# Altium PCB controllerV2.PcbDoc
Units mm, origin at the board's own origin, x right, y up, seen from the top; angles counter-clockwise.
Board outline 94.87 x 83.95 mm, 2 copper layers (Top Layer, Bottom Layer); 87 components, 27 nets, 393 pads, 45 vias.
Unrouted connection lines stored in the file: 2.
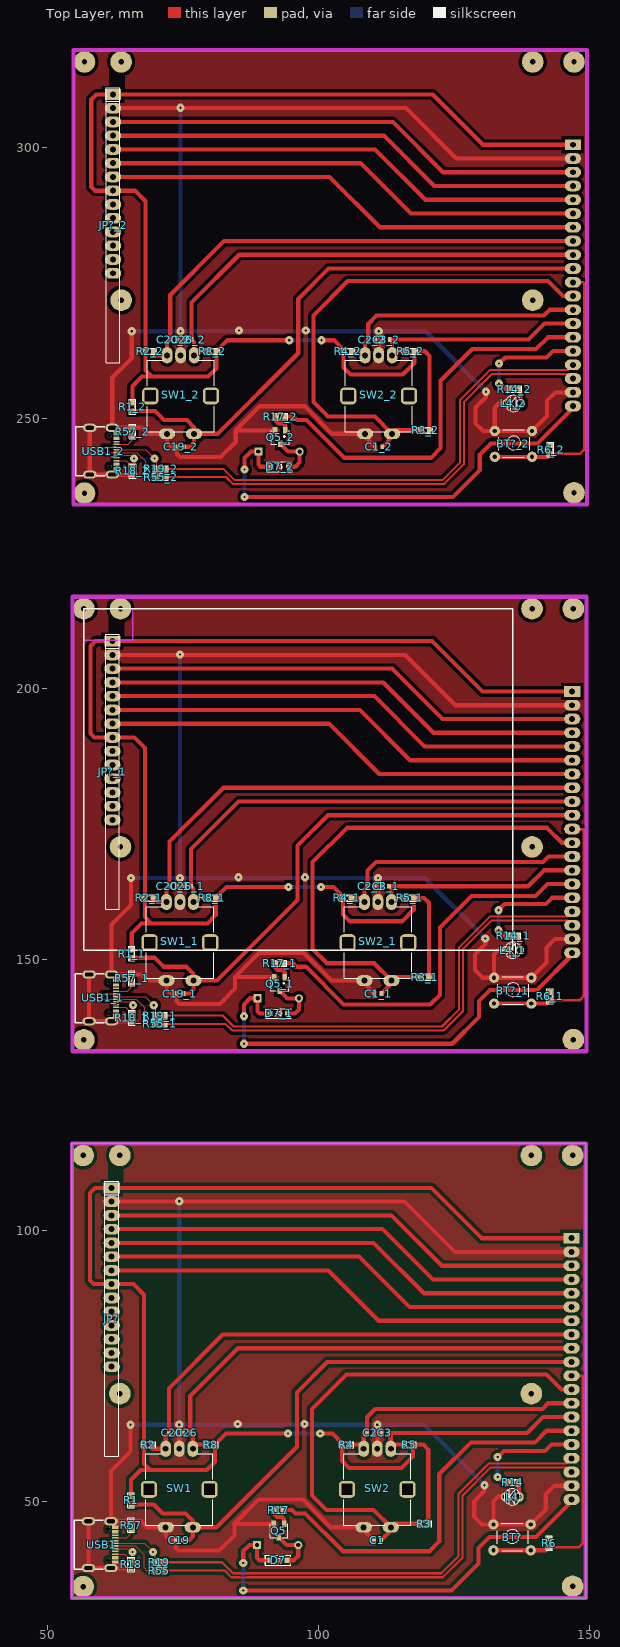
[diagram p0: Top Layer view]
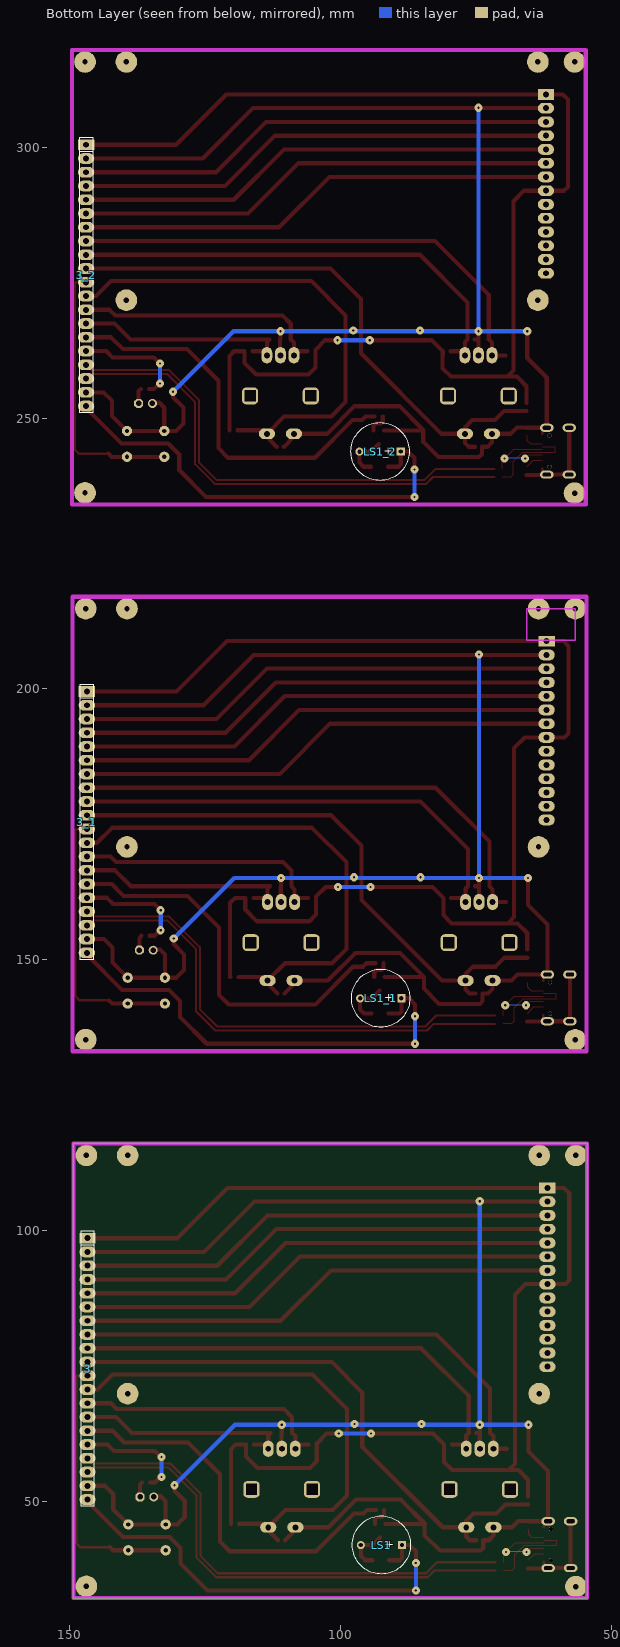
[diagram p1: Bottom Layer view, seen from below]

## Layer stack, top to bottom
Top Solder: solder mask 0.0102, Solder Resist, Dk 3.5
Top Layer: signal copper 0.0356
Dielectric 1: dielectric 0.32, FR-4, Dk 4.8
Bottom Layer: signal copper 0.0356
Bottom Solder: solder mask 0.0102, Solder Resist, Dk 3.5

## Board outline
54.483,32.131 54.483,116.078 149.352,116.078 149.352,32.131

## Design rules (kind name [scope] priority, off if disabled: settings)
Clearance [All] p1: gap=0.635 ignorepadtopadclearanceinfootprint=FALSE
DiffPairsRouting [All] p1: maxlimit=0.381 minlimit=0.356 mostfreqgap=0.356 toplayer_minwidth=0.381 toplayer_maxwidth=0.381 toplayer_prefwidth=0.381 bottomlayer_minwidth=0.381 bottomlayer_maxwidth=0.381 bottomlayer_prefwidth=0.381 maxuncoupledlength=12.7
PolygonConnect [All] p1: connectstyle=Direct reliefconductorwidth=0.254 reliefentries=4 polygonreliefangle="90 Angle" airgapwidth=0.254
RoutingVias [All] p1: holewidth=0.711 width=1.27 viastyle="Through Hole" minholewidth=0.711 minwidth=1.27 maxholewidth=0.711 maxwidth=1.27
SolderMaskExpansion [All] p1: expansion=0.102 istentingtop=FALSE
Width [All] p1: maxlimit=0.762 minlimit=0.203 preferedwidth=0.457
29 further rules are at their usual default settings.

## Classes and differential pairs
component class controller: 3 BT? C1 C2 C3 C19 C20 C26 D7 JP? L4 LS1 Q5 R1 R2 R3 R4 R5 R6 R8 R14 R17 R18 R19 R55 R57 SW1 SW2 USB1
differential pair USB: +USB_P -USB_N

## Components (designator, comment, footprint, x,y, rotation, side; value= is the part's Value field where it differs from the comment)
3 "JP 1x20 2.54" "JP 1x20 DT"#1 146.736,98.577 r270 bottom locked (schematic designator JP3)
3_1 "JP 1x20 2.54" "JP 1x20 DT"#1 146.863,199.542 r270 bottom locked (schematic designator JP3)
3_2 "JP 1x20 2.54" "JP 1x20 DT"#1 146.99,300.507 r270 bottom locked (schematic designator JP3)
BT? "Nut Nhan 4 Chan Cam 6x6" "Nut Nhan 4 Chan Cam 6x6" 132.639,45.923 r0 top
BT?_1 "Nut Nhan 4 Chan Cam 6x6" "Nut Nhan 4 Chan Cam 6x6" 132.766,146.888 r0 top (schematic designator BT?)
BT?_2 "Nut Nhan 4 Chan Cam 6x6" "Nut Nhan 4 Chan Cam 6x6" 132.893,247.853 r0 top (schematic designator BT?)
C1 "0.1uF" CAPC1608X09L 110.886,42.799 r0 top
C1_1 "0.1uF" CAPC1608X09L 111.013,143.764 r0 top (schematic designator C1)
C1_2 "0.1uF" CAPC1608X09L 111.14,244.729 r0 top (schematic designator C1)
C2 "0.1uF" CAPC1608X09L 109.601,62.611 r180 top
C2_1 "0.1uF" CAPC1608X09L 109.728,163.576 r180 top (schematic designator C2)
C2_2 "0.1uF" CAPC1608X09L 109.855,264.541 r180 top (schematic designator C2)
C3 "0.1uF" CAPC1608X09L 112.268,62.611 r0 top
C3_1 "0.1uF" CAPC1608X09L 112.395,163.576 r0 top (schematic designator C3)
C3_2 "0.1uF" CAPC1608X09L 112.522,264.541 r0 top (schematic designator C3)
C19 "0.1uF" CAPC1608X09L 74.295,42.799 r0 top
C19_1 "0.1uF" CAPC1608X09L 74.422,143.764 r0 top (schematic designator C19)
C19_2 "0.1uF" CAPC1608X09L 74.549,244.729 r0 top (schematic designator C19)
C20 "0.1uF" CAPC1608X09L 73.025,62.611 r180 top
C20_1 "0.1uF" CAPC1608X09L 73.152,163.576 r180 top (schematic designator C20)
C20_2 "0.1uF" CAPC1608X09L 73.279,264.541 r180 top (schematic designator C20)
C26 "0.1uF" CAPC1608X09L 75.677,62.611 r0 top
C26_1 "0.1uF" CAPC1608X09L 75.804,163.576 r0 top (schematic designator C26)
C26_2 "0.1uF" CAPC1608X09L 75.931,264.541 r0 top (schematic designator C26)
D7 "S4" "DIODE SOD-123" 92.583,39.116 r180 top
D7_1 "S4" "DIODE SOD-123" 92.71,140.081 r180 top (schematic designator D7)
D7_2 "S4" "DIODE SOD-123" 92.837,241.046 r180 top (schematic designator D7)
JP? "LCD 2.8 INCH" "JP 1x20 DT"#2 61.819,107.868 r270 top
JP?_1 "LCD 2.8 INCH" "JP 1x20 DT"#2 61.946,208.833 r270 top (schematic designator JP?)
JP?_2 "LCD 2.8 INCH" "JP 1x20 DT"#2 62.073,309.798 r270 top (schematic designator JP?)
L4 "LED 3mm" LED-3MM-BLUE 135.636,50.8 r180 top
L4_1 "LED 3mm" LED-3MM-BLUE 135.763,151.765 r180 top (schematic designator L4)
L4_2 "LED 3mm" LED-3MM-BLUE 135.89,252.73 r180 top (schematic designator L4)
LS1 "Coi Chip Speaker" "Coi Chip Speacker" 88.646,41.923 r0 bottom
LS1_1 "Coi Chip Speaker" "Coi Chip Speacker" 88.773,142.888 r0 bottom (schematic designator LS1)
LS1_2 "Coi Chip Speaker" "Coi Chip Speacker" 88.9,243.853 r0 bottom (schematic designator LS1)
Q5 "HF" SOT-23 92.71,44.577 r180 top value=C9014
Q5_1 "HF" SOT-23 92.837,145.542 r180 top value=C9014 (schematic designator Q5)
Q5_2 "HF" SOT-23 92.964,246.507 r180 top value=C9014 (schematic designator Q5)
R1 "10k" "Tro smd 0603" 65.405,50.165 r90 top
R1_1 "10k" "Tro smd 0603" 65.532,151.13 r90 top (schematic designator R1)
R1_2 "10k" "Tro smd 0603" 65.659,252.095 r90 top (schematic designator R1)
R2 "10k" "Tro smd 0603" 68.568,60.452 r180 top
R2_1 "10k" "Tro smd 0603" 68.695,161.417 r180 top (schematic designator R2)
R2_2 "10k" "Tro smd 0603" 68.822,262.382 r180 top (schematic designator R2)
R3 "10k" "Tro smd 0603" 119.507,45.847 r0 top
R3_1 "10k" "Tro smd 0603" 119.634,146.812 r0 top (schematic designator R3)
R3_2 "10k" "Tro smd 0603" 119.761,247.777 r0 top (schematic designator R3)
R4 "10k" "Tro smd 0603" 105.144,60.452 r180 top
R4_1 "10k" "Tro smd 0603" 105.271,161.417 r180 top (schematic designator R4)
R4_2 "10k" "Tro smd 0603" 105.398,262.382 r180 top (schematic designator R4)
R5 "10k" "Tro smd 0603" 116.725,60.452 r0 top
R5_1 "10k" "Tro smd 0603" 116.852,161.417 r0 top (schematic designator R5)
R5_2 "10k" "Tro smd 0603" 116.979,262.382 r0 top (schematic designator R5)
R6 "470RT" "Tro smd 0603" 142.621,42.291 r90 top
R6_1 "470RT" "Tro smd 0603" 142.748,143.256 r90 top (schematic designator R6)
R6_2 "470RT" "Tro smd 0603" 142.875,244.221 r90 top (schematic designator R6)
R8 "10k" "Tro smd 0603" 80.137,60.452 r0 top
R8_1 "10k" "Tro smd 0603" 80.264,161.417 r0 top (schematic designator R8)
R8_2 "10k" "Tro smd 0603" 80.391,262.382 r0 top (schematic designator R8)
R14 "470RT" "Tro smd 0603" 135.89,53.467 r0 top
R14_1 "470RT" "Tro smd 0603" 136.017,154.432 r0 top (schematic designator R14)
R14_2 "470RT" "Tro smd 0603" 136.144,255.397 r0 top (schematic designator R14)
R17 "4.7K" "Tro smd 0603" 92.71,48.387 r180 top
R17_1 "4.7K" "Tro smd 0603" 92.837,149.352 r180 top (schematic designator R17)
R17_2 "4.7K" "Tro smd 0603" 92.964,250.317 r180 top (schematic designator R17)
R18 "5k1" "tro smd 0603" 65.405,38.354 r270 top
R18_1 "5k1" "tro smd 0603" 65.532,139.319 r270 top (schematic designator R18)
R18_2 "5k1" "tro smd 0603" 65.659,240.284 r270 top (schematic designator R18)
R19 "10R" "Tro smd 0603" 70.612,38.735 r0 top
R19_1 "10R" "Tro smd 0603" 70.739,139.7 r0 top (schematic designator R19)
R19_2 "10R" "Tro smd 0603" 70.866,240.665 r0 top (schematic designator R19)
R55 "10R" "Tro smd 0603" 70.612,37.211 r0 top
R55_1 "10R" "Tro smd 0603" 70.739,138.176 r0 top (schematic designator R55)
R55_2 "10R" "Tro smd 0603" 70.866,239.141 r0 top (schematic designator R55)
R57 "5k1" "tro smd 0603" 65.405,45.593 r90 top
R57_1 "5k1" "tro smd 0603" 65.532,146.558 r90 top (schematic designator R57)
R57_2 "5k1" "tro smd 0603" 65.659,247.523 r90 top (schematic designator R57)
SW1 "voltage" 482024764004 74.295,52.197 r90 top
SW1_1 "voltage" 482024764004 74.422,153.162 r90 top (schematic designator SW1)
SW1_2 "voltage" 482024764004 74.549,254.127 r90 top (schematic designator SW1)
SW2 "Current" 482024764004 110.859,52.197 r90 top
SW2_1 "Current" 482024764004 110.986,153.162 r90 top (schematic designator SW2)
SW2_2 "Current" 482024764004 111.113,254.127 r90 top (schematic designator SW2)
USB1 "Type C 16P" "Type C 16P" 58.674,42.418 r270 top
USB1_1 "Type C 16P" "Type C 16P" 58.801,143.383 r270 top (schematic designator USB1)
USB1_2 "Type C 16P" "Type C 16P" 58.928,244.348 r270 top (schematic designator USB1)

## Footprints (in the part's own frame and the unit in brackets; to place one, negate y for a bottom-side part, rotate by r counter-clockwise, add the part's x,y. Pads: shape width x height; smd on the part's side, far side on the other; paste and mask are expansions set on the pad)
482024764004 [mm]
  oval 2x3 hole 1.1: 1(-7,-2.5) 2(-7,2.5)
  oval 3x2 hole 1.1: A(7.5,-2.5) B(7.5,2.5) C(7.5,0)
  rrect50% 3.1x3 hole 2 square: S1(0,5.6) S2(0,-5.6)
  silkscreen extent -6.6,-6.2 6.6,6.2, body extent -7.32,-6.81 7.8,6.81, height 20.1
CAPC1608X09L [mm]
  rect 0.7x0.85 smd: 1(-0.65,0) 2(0.65,0)
  body extent -0.85,-0.45 0.85,0.45, height 0.9
"Coi Chip Speacker" [mm]
  rect 1.5x1.5 hole 0.8: 1(0,0)
  round 1.5 hole 0.8: 2(7.62,0.013)
  silkscreen extent -1.55,-5.38 9.18,5.36, body extent -2.22,-6 13.24,6, height 4.5
"DIODE SOD-123" [mm] "SOD-123"
  rect 0.9x0.95 smd: 1(-1.575,0) 2(1.575,0)
  silkscreen extent -2.3,-0.92 2.41,0.92, body extent -1.86,-0.78 1.86,0.77, height 1.35
"JP 1x20 DT"#1 [mm] "20 pins, 1 row, straight, gold plating"
  rect 2x3 hole 1.1: 1(0,0)
  oval 2x3 hole 1.1: 2(2.54,0) 3(5.08,0) 4(7.62,0) 5(10.16,0) 6(12.7,0) 7(15.24,0) 8(17.78,0) 9(20.32,0) 10(22.86,0) 11(25.4,0) 12(27.94,0) 13(30.48,0) 14(33.02,0) 15(35.56,0) 16(38.1,0) 17(40.64,0) 18(43.18,0) 19(45.72,0) 20(48.26,0)
  silkscreen extent -1.27,-1.27 49.53,1.27, body extent -1.27,-1.27 49.53,1.27, height 8.54
"JP 1x20 DT"#2 [mm] "20 pins, 1 row, straight, gold plating"
  rect 2x3 hole 1.1: 1(0,0)
  oval 2x3 hole 1.1: 2(2.54,0) 3(5.08,0) 4(7.62,0) 5(10.16,0) 6(12.7,0) 7(15.24,0) 8(17.78,0) 9(20.32,0) 10(22.86,0) 11(25.4,0) 12(27.94,0) 13(30.48,0) 14(33.02,0)
  round 0 all layers, no hole: 15(35.56,0) 16(38.1,0) 17(40.64,0) 18(43.18,0) 19(45.72,0) 20(48.26,0)
  silkscreen extent -1.27,-1.27 49.53,1.27, body extent -1.27,-1.27 49.53,1.27, height 8.54
LED-3MM-BLUE [mil]
  oct 65x65 hole 40: 1(-55,0)
  round 65 hole 40: 2(45,0)
  silkscreen extent -64,-59 54,59, body extent -72,-65 54,65, height 184
"Nut Nhan 4 Chan Cam 6x6" [mil] "SW button 4pin, 250 x250 mil"
  round 75 hole 31: 1(-13,-8) 1(258,-8) 2(-13,-196) 2(258,-196)
  silkscreen extent 15,-215 240,0, body extent -31,-225 281,19, height 276
SOT-23 [mm] "SOT 23 _ 1-3-2"
  rect 0.85x1.2 smd: 1(-0.94,-1.245) 2(0.985,-1.25) 3(0.005,1.25)
  silkscreen extent -1.65,-1.27 1.65,1.27, body extent -1.47,-1.33 1.53,1.17, height 1.06
"Tro smd 0603" [mm] "Chip Capacitor, 2-Leads, Body 1,60x0,80mm, IPC Medium Density"
  rect 1x0.95 smd mask+0.076: 1(-0.75,0) 2(0.75,0)
  silkscreen extent -1.35,-0.58 1.37,0.58, body extent -0.82,-0.42 0.82,0.43, height 0.44
"tro smd 0603" [mm] "Chip Capacitor, 2-Leads, Body 1,60x0,80mm, IPC Medium Density"
  rect 1x0.95 smd mask+0.076: 1(-0.75,0) 2(0.75,0)
  silkscreen extent -1.35,-0.58 1.37,0.58, body extent -0.82,-0.42 0.82,0.43, height 0.44
"Type C 16P" [mm]
  oval 1.5x2.5 hole 0.7 slot 1.5 at 90 deg: 0(-3.893,2.998) 0(-3.893,-1.152) 0(4.747,2.998) 0(4.747,-1.152)
  rect 0.6x1.15 smd: A1(-2.773,3.793) A4(-1.973,3.793) A9(2.827,3.797) A12(3.627,3.797)
  rect 0.3x1.15 smd: A5(-0.823,3.798) A6(0.177,3.798) A7(0.677,3.796) A8(1.677,3.798) B5(2.177,3.798) B6(1.177,3.798) B7(-0.323,3.796) B8(-1.323,3.797)
  round 0.75 hole 0.75 unplated: ""(-2.463,2.498) ""(3.317,2.498)
  silkscreen extent -4.07,-3.75 4.98,1.62, body extent -4.02,-3.8 4.92,4.1, height 3.21

## Part data
3 3_1 3_2 JP? JP?_1 JP?_2: library part "JP 1x20 2.54 Duc Thang", "Cắm", Chung_Loai=Cắm, Don_Vi=Con, Ma_Hang=MH000903, Ten_Linh_Kien="Jump Đơn Đực 2.54MM 1x40P Thẳng 11MM"
BT? BT?_1 BT?_2: "Nut Nhan 4 Chan 6x6mm", Ma_Hang=MH004584, Ten="Nút Nhấn 4 Chân 6x6x5MM DIP"
C1 C1_1 C1_2 C2 C2_1 C2_2 C3 C3_1 C3_2 C19 C19_1 C19_2 C20 C20_1 C20_2 C26 C26_1 C26_2: library part GRM188R71H104KA93D, "CAP CER 0.1UF 50V X7R 0603", Manufacturer="Murata Electronics North America", Operating Temperature="-55°C ~ 125°C", Package / Case="0603 (1608 Metric)", Ratings=-, Supplier Part Number 1=490-1519-2-ND, Temperature Coefficient=X7R, Tolerance=±10%, Voltage - Rated=50V, Applications="General Purpose", Capacitance=0.1uF, Category=Capacitors, ComponentLink1Description=http://www.murata.com/~/media/webrenewal/support/library/catalog/products/capacitor/mlcc/c02e.ashx?la=en-us, ComponentLink1URL=http://www.murata.com/~/media/webrenewal/support/library/catalog/products/capacitor/mlcc/c02e.ashx?la=en-us, Features=-, Height - Seated (Max)=-, Lead Spacing=-, Lead Style=-, Manufacturer Part Number=GRM188R71H104KA93D, Mounting Type="Surface Mount, MLCC", Packaging="Tape & Reel (TR)", Part Status=Active, Pricing 1="4000=0.01822, 8000=0.01663, 12000=0.01584 (USD)", Pricing 2="1=0.12, 10=0.084, 100=0.0396, 500=0.02778, 1000=0.023 (USD)", RoHS="RoHS Compliant", Size / Dimension="0.063\" L x 0.032\" W (1.60mm x 0.80mm)", Stock=19812000, Supplier 1=Digi-Key, Supplier 2=Digi-Key, Supplier Part Number 2=490-1519-1-ND, Thickness (Max)="0.035\" (0.90mm)"
D7 D7_1 D7_2: library part "Diode S4", "Dán", Chung_Loai=Dán, Don_Vi=Con, Ma_Hang=MH005519, Ten_Linh_Kien="Diode S4 SOD123 ( 1N5819 SOD123)"
L4 L4_1 L4_2: library part "LED 3mm Xanh Duong", "Cắm", Chung_Loai=Cắm, Don_Vi=Con, Ma_Hang=MH009003, Ten_Linh_Kien="LED 3MM Xanh Dương SS (1000c)"
LS1 LS1_1 LS1_2: "Còi chip"
Q5 Q5_1 Q5_2: library part "Trans C1815 HF SMD", "SOT-23"
R1 R1_1 R1_2 R2 R2_1 R2_2 R3 R3_1 R3_2 R4 R4_1 R4_2 R5 R5_1 R5_2 R6 R6_1 R6_2 R8 R8_1 R8_2 R14 R14_1 R14_2 R17 R17_1 R17_2 R19 R19_1 R19_2 R55 R55_1 R55_2: library part "Tro 0603 5% 10R", "Dán", Chung_Loai=Dán, Don_Vi=Con, Ma_Hang=MH006317, So_Chan=2, Ten_Linh_Kien="Trở 0603 5% 10R"
R18 R18_1 R18_2 R57 R57_1 R57_2: library part "Tro 0603 5% 51k", "Dán", Chung_Loai=Dán, Don_Vi=Con, Ma_Hang=MH007666, So_Chan=2, Ten_Linh_Kien="Trở 0603 5% 51k"
SW1 SW1_1 SW1_2 SW2 SW2_1 SW2_2: library part 482024764004, "WS-ENTV Mechanical Incremental Encoder Switch, Plastic Shaft without bushing, 24Pulse/360°, 24positi", Insulation Resistance=100MΩ, Manufacturer="Wurth Elektronik", Operating Temperature Max=85°C, Operating Temperature Min=-40°C, Rated Current=10mA, Category="Encoder Switches", ComponentLink1Description="Website Link", ComponentLink1URL=https://www.we-online.com/redexpert/article/482024764004?ad, ComponentLink2Description="Datasheet Link", ComponentLink2URL=https://www.we-online.com/redexpert/spec/482024764004?ad, Detent=24positions, Electrical Life Encoder=30000Cycles, Electrical Life Switch=20000Cycles, Height=20mm, Length=13.2mm, Manufacturer Part Number=482024764004, Match Code=WS-ENTV, Mount="Through Hole", Operation Force=300g, Packaging=Tray, Resolution=24Pulse/360°, Width=12.4mm

## Free pads (board coordinates)
  round 4 hole 1: 7(56.54,34.239) 7(56.54,113.868) 7(56.667,135.204) 7(56.667,214.833) 7(56.794,236.169) 7(56.794,315.798) 7(63.319,69.868) 7(63.319,113.868) 7(63.446,170.833) 7(63.446,214.833) 7(63.573,271.798) 7(63.573,315.798) 7(139.319,69.868) 7(139.319,113.868) 7(139.446,170.833) 7(139.446,214.833) 7(139.573,271.798) 7(139.573,315.798) 7(146.939,34.29) 7(146.939,113.868) 7(147.066,135.255) 7(147.066,214.833) 7(147.193,236.22) 7(147.193,315.798)

## Via types
v1: diameter 1.5, hole 0.4, Top Layer to Bottom Layer, 45 vias

## Nets (pads, with @x,y where several pads share a name; then routed paths per layer and width w, separated by ;. In a path a pad name is that pad's centre, name@x,y a point inside that pad or via, vN(x,y) a via of type N, cw(c..) or ccw(c..) an arc to the next point about the centre after c; other vN are vias at no path point)
+5: 3.20 D7.2 LS1.1 | length 84.7
  Top Layer w0.762: v1(86.106,33.528) 124.587,33.528 129.54,38.481 129.54,41.402 131.572,43.434 140.208,43.434 146.736,49.962 3.20 ; v1(86.106,38.608) 86.106,40.767 87.262,41.923 LS1.1 88.646,39.497 89.027,39.116 D7.2
  Bottom Layer w0.762: v1(86.106,33.528) v1(86.106,38.608)
A0: 3.5 JP?.5 | length 88.8
  Top Layer w0.762: JP?.5 110.191,97.708 119.482,88.417 3.5
BT1: 3.11 BT?.2 R6.1 | length 50
  Top Layer w0.457: R6.1 148.094,41.541 148.844,42.291 148.844,73.025 148.692,73.177 3.11
  Top Layer w0.762: BT?.2@132.309,40.945 139.192,40.945 142.025,40.945 R6.1
BT2: 3.12 C1.2 R3.1 SW2.1 | length 93.5
  Top Layer w0.762: C1.2 113.359,44.622 SW2.1 ; R3.1 114.009,45.847 SW2.1 ; 3.12 144.882,70.637 142.113,73.406 105.156,73.406 98.806,67.056 98.806,51.054 101.473,48.387 110.169,48.387 SW2.1
BT3: 3.13 C2.2 R4.1 SW2.B | length 47.7
  Top Layer w0.762: R4.1 107.604,60.452 SW2.B 108.359,62.019 C2.2 108.951,65.517 110.49,67.056 141.351,67.056 142.392,68.097 3.13
BT4: 3.14 C3.2 R5.1 SW2.A | length 41.1
  Top Layer w0.762: R5.1 114.114,60.452 SW2.A 113.359,62.17 C3.2 138.557,62.611 141.503,65.557 3.14
buzzer: 3.15 R17.1 | length 72.9
  Top Layer w0.762: R17.1 95.123,48.387 95.758,47.752 97.536,47.752 104.521,40.767 120.523,40.767 122.301,42.545 122.301,54.991 128.143,60.833 139.954,60.833 142.138,63.017 3.15
CS: 3.3 JP?.3 | length 88.8
  Top Layer w0.762: JP?.3 113.493,102.788 122.784,93.497 3.3
enc_a: 3.8 C20.2 R2.1 SW1.B | length 92.4
  Top Layer w0.762: 69.318,59.69 71.788,59.69 SW1.B 71.795,62.031 C20.2 72.375,70.851 82.321,80.797 3.8
enc_b: 3.9 C26.2 R8.1 SW1.A | length 87
  Top Layer w0.762: R8.1@79.459,60.452 77.55,60.452 SW1.A 76.795,62.143 C26.2 76.327,69.469 85.115,78.257 3.9
enc_c: 3.10 C19.2 R1.1 SW1.1 | length 106.1
  Top Layer w0.762: R1.1 69.584,49.415 71.247,47.752 75.438,47.752 76.795,46.395 SW1.1 ; C19.2 76.073,42.799 76.795,43.521 SW1.1 ; 3.10 101.625,75.717 96.012,70.104 96.012,60.071 81.138,45.197 SW1.1
GND: 3.2 3.19 BT?.1 C1.1 C2.1 C3.1 C19.1 C20.1 C26.1 JP?.2 L4.2 Q5.2 R18.2 R57.2 SW1.2 SW1.C SW2.2 SW2.C USB1.0 USB1.A1 USB1.A12 | length 353.7
  Top Layer w0.457: USB1.0@61.672,37.671 62.471,38.471 USB1.A12 ; USB1.0@61.672,46.311 62.467,45.515 USB1.A1
  Top Layer w0.762: USB1.0@57.522,46.311 57.522,37.671 61.672,37.671 61.739,37.604 R18.2 ; JP?.2 115.906,105.328 125.197,96.037 3.2 ; v1(65.278,64.135) 65.278,59.182 61.672,55.576 61.672,46.311 R57.2@65.373,46.311 ; R57.2 67.195,46.343 68.341,45.197 SW1.2 71.795,43.648 72.644,42.799 C19.1 73.645,41.417 74.168,40.894 81.661,40.894 84.475,43.708 84.475,45.827 ; SW1.C 74.295,62.611 ; v1(74.295,64.135) 74.295,62.611 ; C26.1 74.295,62.611 ; Q5.2 84.475,45.827 ; C1.1 108.359,44.676 SW2.2 102.25,45.197 97.155,50.292 88.9,50.292 84.455,45.847 84.475,45.827 ; SW2.C 110.934,59.773 110.934,62.611 110.871,62.674 v1(110.871,64.135) ; v1(130.683,52.959) 130.683,51.943 128.778,50.038 128.778,47.117 130.175,45.72 BT?.1@132.309,45.72 ; L4.2 134.366,50.927 133.223,50.927 132.309,50.013 BT?.1@132.309,45.72 ; 3.19 143.535,52.857 141.986,51.308 141.986,48.514 139.192,45.72 BT?.1@132.309,45.72
  Bottom Layer w0.762: v1(65.278,64.135) v1(74.295,64.135) ; v1(74.295,105.41) 74.422,105.41 74.295,105.283 v1(74.295,64.135) ; v1(130.683,52.959) 119.507,64.135 v1(110.871,64.135) v1(74.295,64.135)
  other v1: 85.09,64.262 97.409,64.262
led: 3.16 R14.1 | length 20.7
  Top Layer w0.762: v1(133.096,54.483) 133.223,54.483 134.239,53.467 R14.1 ; v1(133.096,58.166) 134.239,59.309 141.859,59.309 143.027,60.477 3.16
  Bottom Layer w0.762: v1(133.096,54.483) v1(133.096,58.166)
MOSI: 3.6 JP?.6 | length 88.8
  Top Layer w0.762: JP?.6 107.524,95.168 116.815,85.877 3.6
NetD7_1: D7.1 LS1.2 Q5.3 | length 8.6
  Top Layer w0.762: Q5.3 94.122,41.91 LS1.2 96.266,39.878 95.504,39.116 D7.1
NetL4_1: L4.1 R14.2 | length 2.8
  Top Layer w0.762: R14.2 137.033,53.074 L4.1
NetQ5_1: Q5.1 R17.2 | length 3.8
  Top Layer w0.762: R17.2 91.96,47.486 92.329,47.117 93.218,47.117 93.65,46.685 Q5.1
NetR18_1: R18.1 USB1.B5 | length 3.4
  Top Layer w0.203: USB1.B5 64.268,40.241 R18.1
NetR19_1: R19.1 USB1.A6 USB1.B6 | length 17
  Top Layer w0.203: USB1.B6 65.058,41.241 v1(65.659,40.64) ; USB1.A6 67.868,42.241 v1(69.469,40.64) 69.862,40.247 R19.1
  Bottom Layer w0.203: v1(65.659,40.64) v1(69.469,40.64)
NetR55_1: R55.1 USB1.A7 USB1.B7 | length 16.5
  Top Layer w0.203: USB1.B7 60.071,42.741 60.071,41.741 USB1.A7 66.209,41.741 67.818,40.132 67.818,37.719 68.326,37.211 R55.1
NetR57_1: R57.1 USB1.A5 | length 4.1
  Top Layer w0.203: USB1.A5 64.577,43.241 65.278,43.942 65.278,44.716 R57.1
RST: 3.4 JP?.4 | length 88.8
  Top Layer w0.762: JP?.4 111.842,100.248 121.133,90.957 3.4
SCK: 3.7 JP?.7 | length 88.8
  Top Layer w0.762: JP?.7 101.809,92.628 111.1,83.337 3.7
USB_N: 3.18 R55.2 | length 91.4
  Top Layer w0.381: R55.2 82.677,37.211 83.922,35.966 85.362,35.966 85.375,35.954 86.837,35.954 86.85,35.966 122.987,35.966 126.594,39.573 126.594,51.054 131.801,56.261 145.872,56.261 3.18
USB_P: 3.17 R19.2 | length 91.7
  Top Layer w0.381: R19.2 82.195,38.735 84.227,36.703 85.667,36.703 85.68,36.69 86.532,36.69 86.545,36.703 122.682,36.703 125.857,39.878 125.857,51.359 131.495,56.998 145.796,56.998 3.17
VBUS: USB1.A4 USB1.A9
VCC: 3.1 JP?.1 JP?.8 R1.2 R2.2 R3.2 R4.2 R5.2 R6.2 R8.2 | length 238.3
  Top Layer w0.762: R1.2 65.405,53.975 67.183,55.753 68.961,55.753 ; v1(94.361,62.484) 82.919,62.484 R8.2 80.887,59.817 80.899,59.805 80.899,57.277 79.375,55.753 68.961,55.753 ; v1(100.33,62.484) 102.616,62.484 104.394,60.706 R4.2 104.394,57.404 105.664,56.134 115.316,56.134 117.475,58.293 R5.2 119.38,60.452 120.269,59.563 120.269,45.859 R3.2 ; 3.1 130.15,98.577 120.859,107.868 JP?.1 58.719,107.868 57.785,106.934 57.785,90.805 58.502,90.088 JP?.8 65.868,90.088 67.818,88.138 R2.2 67.818,56.896 68.961,55.753
  Bottom Layer w0.762: v1(94.361,62.484) v1(100.33,62.484)
pads on no net: 3_1.1 3_1.2 3_1.3 3_1.4 3_1.5 3_1.6 3_1.7 3_1.8 3_1.9 3_1.10 3_1.11 3_1.12 3_1.13 3_1.14 3_1.15 3_1.16 3_1.17 3_1.18 3_1.19 3_1.20 3_2.1 3_2.2 3_2.3 3_2.4 3_2.5 3_2.6 3_2.7 3_2.8 3_2.9 3_2.10 3_2.11 3_2.12 3_2.13 3_2.14 3_2.15 3_2.16 3_2.17 3_2.18 3_2.19 3_2.20 BT?_1.1 BT?_1.2 BT?_2.1 BT?_2.2 C1_1.1 C1_1.2 C1_2.1 C1_2.2 C2_1.1 C2_1.2 C2_2.1 C2_2.2 C3_1.1 C3_1.2 C3_2.1 C3_2.2 C19_1.1 C19_1.2 C19_2.1 C19_2.2 C20_1.1 C20_1.2 C20_2.1 C20_2.2 C26_1.1 C26_1.2 C26_2.1 C26_2.2 D7_1.1 D7_1.2 D7_2.1 D7_2.2 JP?.9 JP?.10 JP?.11 JP?.12 JP?.13 JP?.14 JP?.15 JP?.16 JP?.17 JP?.18 JP?.19 JP?.20 JP?_1.1 JP?_1.2 JP?_1.3 JP?_1.4 JP?_1.5 JP?_1.6 JP?_1.7 JP?_1.8 JP?_1.9 JP?_1.10 JP?_1.11 JP?_1.12 JP?_1.13 JP?_1.14 JP?_1.15 JP?_1.16 JP?_1.17 JP?_1.18 JP?_1.19 JP?_1.20 JP?_2.1 JP?_2.2 JP?_2.3 JP?_2.4 JP?_2.5 JP?_2.6 JP?_2.7 JP?_2.8 JP?_2.9 JP?_2.10 JP?_2.11 JP?_2.12 JP?_2.13 JP?_2.14 JP?_2.15 JP?_2.16 JP?_2.17 JP?_2.18 JP?_2.19 JP?_2.20 L4_1.1 L4_1.2 L4_2.1 L4_2.2 LS1_1.1 LS1_1.2 LS1_2.1 LS1_2.2 Q5_1.1 Q5_1.2 Q5_1.3 Q5_2.1 Q5_2.2 Q5_2.3 R1_1.1 R1_1.2 R1_2.1 R1_2.2 R2_1.1 R2_1.2 R2_2.1 R2_2.2 R3_1.1 R3_1.2 R3_2.1 R3_2.2 R4_1.1 R4_1.2 R4_2.1 R4_2.2 R5_1.1 R5_1.2 R5_2.1 R5_2.2 R6_1.1 R6_1.2 R6_2.1 R6_2.2 R8_1.1 R8_1.2 R8_2.1 R8_2.2 R14_1.1 R14_1.2 R14_2.1 R14_2.2 R17_1.1 R17_1.2 R17_2.1 R17_2.2 R18_1.1 R18_1.2 R18_2.1 R18_2.2 R19_1.1 R19_1.2 R19_2.1 R19_2.2 R55_1.1 R55_1.2 R55_2.1 R55_2.2 R57_1.1 R57_1.2 R57_2.1 R57_2.2 SW1.S1 SW1.S2 SW1_1.1 SW1_1.2 SW1_1.A SW1_1.B SW1_1.C SW1_1.S1 SW1_1.S2 SW1_2.1 SW1_2.2 SW1_2.A SW1_2.B SW1_2.C SW1_2.S1 SW1_2.S2 SW2.S1 SW2.S2 SW2_1.1 SW2_1.2 SW2_1.A SW2_1.B SW2_1.C SW2_1.S1 SW2_1.S2 SW2_2.1 SW2_2.2 SW2_2.A SW2_2.B SW2_2.C SW2_2.S1 SW2_2.S2 USB1. USB1.A8 USB1.B8 USB1_1. USB1_1.0 USB1_1.A1 USB1_1.A4 USB1_1.A5 USB1_1.A6 USB1_1.A7 USB1_1.A8 USB1_1.A9 USB1_1.A12 USB1_1.B5 USB1_1.B6 USB1_1.B7 USB1_1.B8 USB1_2. USB1_2.0 USB1_2.A1 USB1_2.A4 USB1_2.A5 USB1_2.A6 USB1_2.A7 USB1_2.A8 USB1_2.A9 USB1_2.A12 USB1_2.B5 USB1_2.B6 USB1_2.B7 USB1_2.B8
copper on no net: | length 3942.5
  Top Layer w0.203: 62.597,143.706 60.198,143.706 60.198,142.706 62.597,142.706 66.336,142.706 67.945,141.097 67.945,138.684 68.453,138.176 69.989,138.176 ; 62.599,141.206 64.395,141.206 65.532,140.069 ; 62.599,142.206 65.185,142.206 v1(65.786,141.605) ; 62.599,143.206 67.995,143.206 v1(69.596,141.605) 69.989,141.212 69.989,139.7 ; 62.599,144.206 64.704,144.206 65.405,144.907 65.405,145.681 65.532,145.808 ; 62.724,244.671 60.325,244.671 60.325,243.671 62.724,243.671 66.463,243.671 68.072,242.062 68.072,239.649 68.58,239.141 70.116,239.141 ; 62.726,242.171 64.522,242.171 65.659,241.034 ; 62.726,243.171 65.312,243.171 v1(65.913,242.57) ; 62.726,244.171 68.122,244.171 v1(69.723,242.57) 70.116,242.177 70.116,240.665 ; 62.726,245.171 64.831,245.171 65.532,245.872 65.532,246.646 65.659,246.773
  Top Layer w0.381: 71.489,138.176 82.804,138.176 84.049,136.931 85.489,136.931 85.502,136.919 86.964,136.919 86.977,136.931 123.114,136.931 126.721,140.538 126.721,152.019 131.928,157.226 145.999,157.226 146.863,156.362 ; 71.489,139.7 82.322,139.7 84.354,137.668 85.794,137.668 85.807,137.655 86.659,137.655 86.672,137.668 122.809,137.668 125.984,140.843 125.984,152.324 131.622,157.963 145.923,157.963 146.863,158.902 ; 71.616,239.141 82.931,239.141 84.176,237.896 85.616,237.896 85.629,237.884 87.091,237.884 87.104,237.896 123.241,237.896 126.848,241.503 126.848,252.984 132.055,258.191 146.126,258.191 146.99,257.327 ; 71.616,240.665 82.449,240.665 84.481,238.633 85.921,238.633 85.934,238.62 86.786,238.62 86.799,238.633 122.936,238.633 126.111,241.808 126.111,253.289 131.749,258.928 146.05,258.928 146.99,259.867
  Top Layer w0.457: 61.799,138.636 62.598,139.436 62.598,139.756 ; 61.799,147.276 62.594,146.48 62.594,146.156 ; 61.926,239.601 62.725,240.401 62.725,240.721 ; 61.926,248.241 62.721,247.445 62.721,247.121 ; 142.748,142.506 148.221,142.506 148.971,143.256 148.971,173.99 148.819,174.142 146.863,174.142 ; 142.875,243.471 148.348,243.471 149.098,244.221 149.098,274.955 148.946,275.107 146.99,275.107
  Top Layer w0.762: 57.649,147.276 57.649,138.636 61.799,138.636 61.866,138.569 65.532,138.569 ; 57.776,248.241 57.776,239.601 61.926,239.601 61.993,239.534 65.659,239.534 ; 61.946,193.593 101.936,193.593 111.227,184.302 146.863,184.302 ; 61.946,196.133 107.651,196.133 116.942,186.842 146.863,186.842 ; 61.946,198.673 110.318,198.673 119.609,189.382 146.863,189.382 ; 61.946,201.213 111.969,201.213 121.26,191.922 146.863,191.922 ; 61.946,203.753 113.62,203.753 122.911,194.462 146.863,194.462 ; 61.946,206.293 116.033,206.293 125.324,197.002 146.863,197.002 ; 62.073,294.558 102.063,294.558 111.354,285.267 146.99,285.267 ; 62.073,297.098 107.778,297.098 117.069,287.807 146.99,287.807 ; 62.073,299.638 110.445,299.638 119.736,290.347 146.99,290.347 ; 62.073,302.178 112.096,302.178 121.387,292.887 146.99,292.887 ; 62.073,304.718 113.747,304.718 123.038,295.427 146.99,295.427 ; 62.073,307.258 116.16,307.258 125.451,297.967 146.99,297.967 ; v1(65.405,165.1) 65.405,160.147 61.799,156.541 61.799,147.276 65.5,147.276 ; 65.532,147.308 67.322,147.308 68.468,146.162 71.922,146.162 71.922,144.613 72.771,143.764 73.772,143.764 73.772,142.382 74.295,141.859 81.788,141.859 84.602,144.673 84.602,146.792 ; 65.532,150.38 69.711,150.38 71.374,148.717 75.565,148.717 76.922,147.36 76.922,146.162 ; 65.532,151.88 65.532,154.94 67.31,156.718 69.088,156.718 ; v1(65.532,266.065) 65.532,261.112 61.926,257.506 61.926,248.241 65.627,248.241 ; 65.659,248.273 67.449,248.273 68.595,247.127 72.049,247.127 72.049,245.578 72.898,244.729 73.899,244.729 73.899,243.347 74.422,242.824 81.915,242.824 84.729,245.638 84.729,247.757 ; 65.659,251.345 69.838,251.345 71.501,249.682 75.692,249.682 77.049,248.325 77.049,247.127 ; 65.659,252.845 65.659,255.905 67.437,257.683 69.215,257.683 ; 69.445,160.655 71.915,160.655 71.922,160.662 71.922,162.996 72.502,163.576 72.502,171.816 82.448,181.762 146.863,181.762 ; 69.572,261.62 72.042,261.62 72.049,261.627 72.049,263.961 72.629,264.541 72.629,272.781 82.575,282.727 146.99,282.727 ; 74.422,160.662 74.422,163.576 ; v1(74.422,165.1) 74.422,163.576 ; 74.549,261.627 74.549,264.541 ; v1(74.549,266.065) 74.549,264.541 ; 75.072,143.764 76.2,143.764 76.922,144.486 76.922,146.162 ; 75.154,163.576 74.422,163.576 ; 75.199,244.729 76.327,244.729 77.049,245.451 77.049,247.127 ; 75.281,264.541 74.549,264.541 ; 79.586,161.417 77.677,161.417 76.922,160.662 76.922,163.108 76.454,163.576 76.454,170.434 85.242,179.222 146.863,179.222 ; 79.713,262.382 77.804,262.382 77.049,261.627 77.049,264.073 76.581,264.541 76.581,271.399 85.369,280.187 146.99,280.187 ; v1(86.233,134.493) 124.714,134.493 129.667,139.446 129.667,142.367 131.699,144.399 140.335,144.399 146.863,150.927 146.863,151.282 ; v1(86.233,139.573) 86.233,141.732 87.389,142.888 88.773,142.888 88.773,140.462 89.154,140.081 91.135,140.081 ; v1(86.36,235.458) 124.841,235.458 129.794,240.411 129.794,243.332 131.826,245.364 140.462,245.364 146.99,251.892 146.99,252.247 ; v1(86.36,240.538) 86.36,242.697 87.516,243.853 88.9,243.853 88.9,241.427 89.281,241.046 91.262,241.046 ; 91.852,146.792 84.602,146.792 ; 91.979,247.757 84.729,247.757 ; 92.087,149.352 92.087,148.451 92.456,148.082 93.345,148.082 93.777,147.65 93.777,146.787 ; 92.214,250.317 92.214,249.416 92.583,249.047 93.472,249.047 93.904,248.615 93.904,247.752 ; 92.832,144.292 94.249,142.875 96.393,142.875 96.393,140.843 95.631,140.081 94.285,140.081 ; 92.959,245.257 94.376,243.84 96.52,243.84 96.52,241.808 95.758,241.046 94.412,241.046 ; 93.587,149.352 95.25,149.352 95.885,148.717 97.663,148.717 104.648,141.732 120.65,141.732 122.428,143.51 122.428,155.956 128.27,161.798 140.081,161.798 142.265,163.982 146.863,163.982 ; 93.714,250.317 95.377,250.317 96.012,249.682 97.79,249.682 104.775,242.697 120.777,242.697 122.555,244.475 122.555,256.921 128.397,262.763 140.208,262.763 142.392,264.947 146.99,264.947 ; v1(94.488,163.449) 83.046,163.449 81.014,161.417 81.014,160.782 81.026,160.77 81.026,158.242 79.502,156.718 69.088,156.718 ; v1(94.615,264.414) 83.173,264.414 81.141,262.382 81.141,261.747 81.153,261.735 81.153,259.207 79.629,257.683 69.215,257.683 ; v1(100.457,163.449) 102.743,163.449 104.521,161.671 104.521,161.417 104.521,158.369 105.791,157.099 115.443,157.099 117.602,159.258 117.602,161.417 119.507,161.417 120.396,160.528 120.396,146.824 120.384,146.812 ; v1(100.584,264.414) 102.87,264.414 104.648,262.636 104.648,262.382 104.648,259.334 105.918,258.064 115.57,258.064 117.729,260.223 117.729,262.382 119.634,262.382 120.523,261.493 120.523,247.789 120.511,247.777 ; 106.021,161.417 107.731,161.417 108.486,160.662 108.486,162.984 109.078,163.576 109.078,166.482 110.617,168.021 141.478,168.021 142.519,169.062 146.863,169.062 ; 106.148,262.382 107.858,262.382 108.613,261.627 108.613,263.949 109.205,264.541 109.205,267.447 110.744,268.986 141.605,268.986 142.646,270.027 146.99,270.027 ; 110.363,143.764 108.486,145.641 108.486,146.162 102.377,146.162 97.282,151.257 89.027,151.257 84.582,146.812 84.602,146.792 ; 110.49,244.729 108.613,246.606 108.613,247.127 102.504,247.127 97.409,252.222 89.154,252.222 84.709,247.777 84.729,247.757 ; 110.986,160.662 111.061,160.738 111.061,163.576 110.998,163.639 v1(110.998,165.1) ; 111.113,261.627 111.188,261.703 111.188,264.541 111.125,264.604 v1(111.125,266.065) ; 111.663,143.764 113.486,145.587 113.486,146.162 ; 111.79,244.729 113.613,246.552 113.613,247.127 ; 116.102,161.417 114.241,161.417 113.486,160.662 113.486,163.135 113.045,163.576 138.684,163.576 141.63,166.522 146.863,166.522 ; 116.229,262.382 114.368,262.382 113.613,261.627 113.613,264.1 113.172,264.541 138.811,264.541 141.757,267.487 146.99,267.487 ; 118.884,146.812 114.136,146.812 113.486,146.162 ; 119.011,247.777 114.263,247.777 113.613,247.127 ; v1(130.81,153.924) 130.81,152.908 128.905,151.003 128.905,148.082 130.302,146.685 132.436,146.685 ; v1(130.937,254.889) 130.937,253.873 129.032,251.968 129.032,249.047 130.429,247.65 132.563,247.65 ; 132.436,141.91 139.319,141.91 142.152,141.91 142.748,142.506 ; 132.563,242.875 139.446,242.875 142.279,242.875 142.875,243.471 ; v1(133.223,155.448) 133.35,155.448 134.366,154.432 135.267,154.432 ; v1(133.223,159.131) 134.366,160.274 141.986,160.274 143.154,161.442 146.863,161.442 ; v1(133.35,256.413) 133.477,256.413 134.493,255.397 135.394,255.397 ; v1(133.35,260.096) 134.493,261.239 142.113,261.239 143.281,262.407 146.99,262.407 ; 134.62,151.765 134.493,151.892 133.35,151.892 132.436,150.978 132.436,146.685 ; 134.747,252.73 134.62,252.857 133.477,252.857 132.563,251.943 132.563,247.65 ; 136.767,154.432 137.16,154.039 137.16,151.765 ; 136.894,255.397 137.287,255.004 137.287,252.73 ; 146.863,153.822 143.662,153.822 142.113,152.273 142.113,149.479 139.319,146.685 132.436,146.685 ; 146.863,171.602 145.009,171.602 142.24,174.371 105.283,174.371 98.933,168.021 98.933,152.019 101.6,149.352 110.296,149.352 113.486,146.162 ; 146.863,176.682 101.752,176.682 96.139,171.069 96.139,161.036 81.265,146.162 76.922,146.162 ; 146.863,199.542 130.277,199.542 120.986,208.833 61.946,208.833 58.846,208.833 57.912,207.899 57.912,191.77 58.629,191.053 61.946,191.053 65.995,191.053 67.945,189.103 67.945,161.417 67.945,157.861 69.088,156.718 ; 146.99,254.787 143.789,254.787 142.24,253.238 142.24,250.444 139.446,247.65 132.563,247.65 ; 146.99,272.567 145.136,272.567 142.367,275.336 105.41,275.336 99.06,268.986 99.06,252.984 101.727,250.317 110.423,250.317 113.613,247.127 ; 146.99,277.647 101.879,277.647 96.266,272.034 96.266,262.001 81.392,247.127 77.049,247.127 ; 146.99,300.507 130.404,300.507 121.113,309.798 62.073,309.798 58.973,309.798 58.039,308.864 58.039,292.735 58.756,292.018 62.073,292.018 66.122,292.018 68.072,290.068 68.072,262.382 68.072,258.826 69.215,257.683
  Bottom Layer w0.203: v1(65.786,141.605) v1(69.596,141.605) ; v1(65.913,242.57) v1(69.723,242.57)
  Bottom Layer w0.762: v1(65.405,165.1) v1(74.422,165.1) ; v1(65.532,266.065) v1(74.549,266.065) ; v1(74.422,206.375) 74.549,206.375 74.422,206.248 v1(74.422,165.1) ; v1(74.549,307.34) 74.676,307.34 74.549,307.213 v1(74.549,266.065) ; v1(86.233,134.493) v1(86.233,139.573) ; v1(86.36,235.458) v1(86.36,240.538) ; v1(94.488,163.449) v1(100.457,163.449) ; v1(94.615,264.414) v1(100.584,264.414) ; v1(130.81,153.924) 119.634,165.1 v1(110.998,165.1) v1(74.422,165.1) ; v1(130.937,254.889) 119.761,266.065 v1(111.125,266.065) v1(74.549,266.065) ; v1(133.223,155.448) v1(133.223,159.131) ; v1(133.35,256.413) v1(133.35,260.096)
  other v1: 85.217,165.227 97.536,165.227 85.344,266.192 97.663,266.192

## Polygon pours and split planes (outlines as drawn)
no net on Top Layer "NONET_L-01_P-001" (solid, remove dead copper, pour order 2): 54.737,318.008 149.606,318.008 149.606,234.061 54.737,234.061
no net on Top Layer "NONET_L-01_P-001" (solid, remove dead copper, pour order 1): 54.61,217.043 149.479,217.043 149.479,133.096 54.61,133.096
GND on Top Layer "NONET_L-01_P-001" (solid, remove dead copper, pour order 0): 54.483,116.078 149.352,116.078 149.352,32.131 54.483,32.131

## Keep-outs
Keep-Out Layer:
  lines w0.254: 56.667,209.042 65.667,209.042 65.667,214.833 56.667,214.833 56.667,209.042
  lines w0.762: 54.483,32.131 149.352,32.131 149.352,116.078 54.483,116.078 54.483,32.131 ; 54.61,133.096 54.61,217.043 149.479,217.043 149.479,133.096 54.61,133.096 ; 54.737,234.061 54.737,318.008 149.606,318.008 149.606,234.061 54.737,234.061

## Silkscreen, mask and mechanical layers (free items; w line width, h text height)
Top Overlay:
  lines w0.254: 56.667,151.765 135.89,151.765 135.89,214.833 56.667,214.833 56.667,151.765

## Text inside footprints (layer, text, board x,y; h text height)
LS1: Bottom Overlay "+" at 90.056,42.634 h1.52 r180
LS1_1: Bottom Overlay "+" at 90.183,143.599 h1.52 r180
LS1_2: Bottom Overlay "+" at 90.31,244.564 h1.52 r180